# Altium PCB PCB1.PcbDoc (part 2 of 2)
Units mil, origin at the board's own origin, x right, y up, seen from the top; angles counter-clockwise.
Board outline 4250 x 4000 mil, 2 copper layers (Top Layer, Bottom Layer); 133 components, 79 nets, 459 pads, 109 vias.
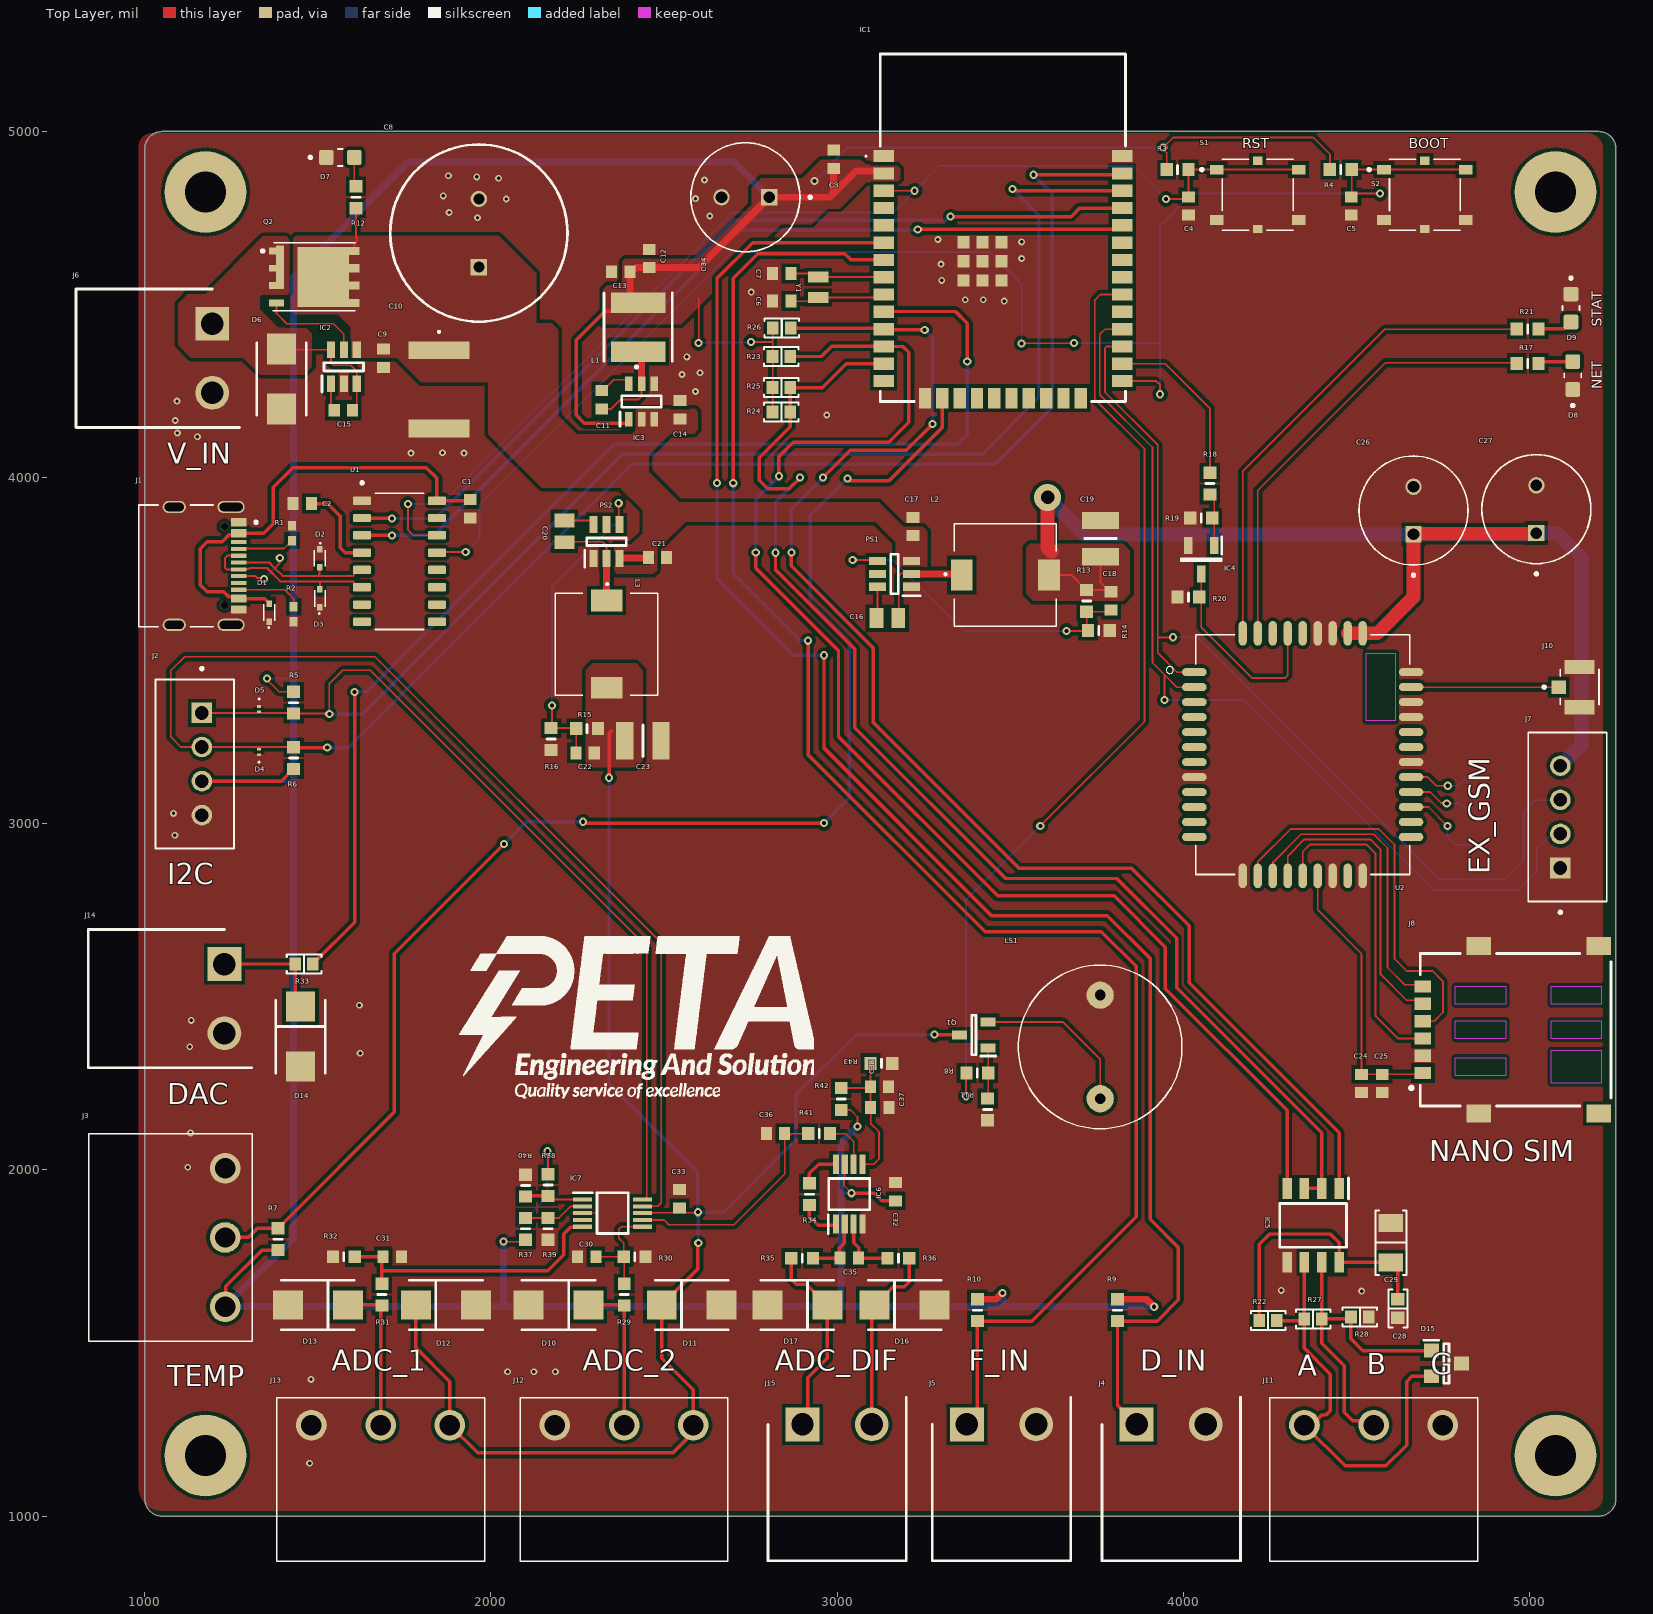
[diagram p0: Top Layer view]

## Via types
v1: diameter 23.62, hole 11.81, Top Layer to Bottom Layer, 62 vias
v2: diameter 19.68, hole 9.84, Top Layer to Bottom Layer, 46 vias
v3: diameter 78.74, hole 39.37, Top Layer to Bottom Layer, 1 vias

## Nets (pads, with @x,y where several pads share a name; then routed paths per layer and width w, separated by ;. In a path a pad name is that pad's centre, name@x,y a point inside that pad or via, vN(x,y) a via of type N, cw(c..) or ccw(c..) an arc to the next point about the centre after c; other vN are vias at no path point) (continued)
GND: (continued)
  other v2: 1476,1153 1480,1395 2048,1417 2124,1417 2186,1417 4515,1650 4283,1652 1124,2008 1132,2107 1622,2337 1130,2356 1134,2432 1620,2476 1087,2967 1083,3030 1769,4071 1922,4071 1860,4072 1152,4118 1094,4129 1088,4165 2970,4181 1093,4221 2591,4249 2552,4298 2604,4303 2566,4349 3483,4510 3370,4514 3422,4514 2752,4536 3302,4570 3300,4617 3533,4633 3533,4681 3291,4688 1961,4751 2632,4756 1879,4766 2044,4805 2591,4806 1862,4814 2617,4860 2022,4865 1959,4869 1877,4872
I2C_1_CLK: D4.2 IC1.37 IC7.9 J2.2 R6.1 | length 6700.8
  Top Layer w5: R6.1@1430,3236.5 1417.28,3223.78 1412.37,3223.78 1410.44,3221.85 J2.2 1104.15,3221.85 1075,3251 1075,3443 1115,3483 1665,3483 2492,2656 2492,1905 2482,1895 IC7.9
  Top Layer w10: R6.1 1431.5,3220 v1(1527,3220) ; v1(3567,4875) 3819.49,4875 IC1.37
  Bottom Layer w10: v1(1527,3220) 1588,3220 2407,4039 3456,4039 3621,4204 3621,4821 v1(3567,4875)
I2C_1_SDA: D5.2 IC1.36 IC7.10 J2.1 R5.1 | length 5831.2
  Top Layer w5: J2.1 1428.23,3320.28 R5.1 1531.5,3318.5 v1(1533,3317) 1533,3405 1572,3444 1651,3444 2450.02,2644.98 IC7.10@2450.02,1916.3
  Top Layer w10: v1(3507,4834) 3510.69,4834 3515.75,4828.94 IC1.36
  Bottom Layer w10: v1(1533,3317) 1629,3317 2380,4068 3419,4068 3583,4232 3583,4758 v1(3507,4834)
LSE_OSC_IN: C7.2 IC1.8 Y1.1 | length 272.7
  Top Layer w5: C7.2 2934.53,4590 Y1.1 3133.86,4579.53 IC1.8
LSE_OSC_OUT: C6.2 IC1.9 Y1.2 | length 275.9
  Top Layer w5: C6.2 2934.53,4510 Y1.2 3125.98,4520.47 IC1.9
NetC2_2: C2.2 U1.4 | length 258.1
  Top Layer w10: C2.2 1528,3925 1565,3888 1565,3797 1578.57,3783.43 U1.4
NetC11_1: C11.1 IC3.6 | length 97.6
  Top Layer w5: C11.1 2322.56,4251.38 2354.18,4283 2389.27,4283 2397.6,4274.67 IC3.6
NetC11_2: C11.2 IC3.5 L1.1 | length 263.9
  Top Layer w5: C11.2 2347.62,4198.62 2375,4226 2427,4226 2435,4234 IC3.5
  Top Layer w20: L1.1 2435,4354.13 IC3.5
NetC15_1: C15.1 D6.1 IC2.3 IC2.6 J6.1 Q2.1 Q2.2 Q2.3 Q2.10 | length 383.2
  Top Layer w5: D6.1 1397.4,4369.21 IC2.6 1537.6,4332.4 1545,4325 1595,4325 1612.4,4307.6 IC2.3 1612.4,4207.4 C15.1
NetC15_2: C15.2 IC2.1 | length 79.8
  Top Layer w5: IC2.1 1537.6,4204.65 C15.2
NetC16_1: C16.1 L2.1 PS1.2 | length 339
  Top Layer w5: C16.1@3170.07,3619.17 C16.1@3195.24,3594 ; C16.1@3178.07,3619.17 3178.07,3716.07 3186,3724 PS1.2@3215.21,3724 ; L2.1@3340.02,3739 L2.1
  Top Layer w20: PS1.2@3223.58,3722.19 3356.83,3722.19 L2.1
NetC16_2: C16.2 PS1.6 | length 94.6
  Top Layer w5: PS1.6@3116.79,3686.6 3116.79,3598.72 C16.2@3121.5,3594
NetC18_1: C18.1 PS1.4 R13.1 R14.2 | length 965.2
  Top Layer w5: v1(3045,3762) 3114.19,3762 PS1.4 ; v1(3663,3557) 3722.5,3557 R14.2 3721,3562.5 R13.1 3785.88,3612.5 C18.1
  Bottom Layer w5: v1(3045,3762) 3161,3762 3366,3557 v1(3663,3557)
NetC20_1: C20.1 L3.1 PS2.2 | length 283
  Top Layer w5: C20.1@2214,3815 2322,3815 2334,3803 PS2.2
  Top Layer w20: L3.1 PS2.2
NetC20_2: C20.2 PS2.6 | length 91.4
  Top Layer w5: C20.2 2287.29,3876.5 2296.6,3867.19 PS2.6
NetC22_1: C22.1 PS2.4 R15.1 R16.2 | length 938.4
  Top Layer w5: v1(2176,3342) 2176,3278.5 R16.2 2244.51,3276.5 R15.1 2246.01,3211.61 C22.1@2252.62,3205 ; v1(2369,3926) 2369,3866.61 PS2.4
  Bottom Layer w5: v1(2176,3342) 2176,3684.84 2369,3877.84 v1(2369,3926)
NetC35_1: C35.1 IC6.2 R35.2 | length 176.3
  Top Layer w10: R35.2 3001.5,1745 3004.54,1745 C35.1@3004.73,1745.2 ; C35.1@3001.5,1750 3005.65,1754.15 3005.65,1773.65 3020.47,1788.47 3020.47,1841.65 IC6.2
NetC35_2: C35.2 IC6.3 R36.2 | length 187.1
  Top Layer w10: IC6.3 3047.8,1790.2 3062.9,1775.1 C35.2@3062.9,1750.61 ; C35.2@3057.49,1745.2 3057.69,1745 R36.2
NetC37_1: C37.1 C38.1 IC6.5 R42.1 R43.2 | length 425.9
  Top Layer w5: R42.1 3092.06,2236.5 C38.1 ; IC6.5 3105.61,2016.61 3121,2032 3121,2110 3097.06,2133.94 C37.1 3096.5,2181.06 R43.2
NetD7_A: D7.A R12.2 | length 85.4
  Top Layer w5: D7.A 1605.35,4846.14 R12.2
NetD8_A: D8.A R17.2 | length 100.7
  Top Layer w10: R17.2 5031.85,4335.35 D8.A
NetD9_A: D9.A R21.2 | length 101.6
  Top Layer w10: R21.2 5100.01,4430 5119.66,4449.65 D9.A
NetD10_1: D10.1 J12.2 R29.1 | length 449.6
  Top Layer w10: D10.1 2383.5,1610 R29.1 2384.7,1608.2 J12.2
NetD13_1: D13.1 J13.2 R31.1 | length 446
  Top Layer w10: D13.1 1683.5,1610 R31.1 1681.36,1604.87 J13.2
NetD14_1: D14.1 J14.1 R33.2 | length 334.3
  Top Layer w10: J14.1 R33.2 1434.41,2487.2 D14.1
NetD15_1: D15.1 IC5.7 J11.2 R27.2 R28.2 | length 955.5
  Top Layer w10: IC5.7 4400,1570.59 R27.2 ; J11.2 4538.03,1275 4490,1275 4465,1300 4465,1435 4400.59,1499.41 R27.2 ; D15.1 4716.29,1478 4519,1478 4484.41,1512.59 R28.2 4479.41,1570 R27.2
NetD15_2: D15.2 IC5.6 J11.1 R22.1 R27.1 | length 1263
  Top Layer w10: R22.1 4344.41,1565 R27.1 ; IC5.6 4350,1570.59 R27.1 ; D15.2 4660.6,1403.6 4645,1388 4645,1205 4585,1145 4468.03,1145 J11.1 4371.26,1263.03 4400.44,1292.21 4412.21,1292.21 4425,1305 4425,1410 4349.41,1485.59 R27.1
NetD16_1: D16.1 J15.2 R36.1 | length 540
  Top Layer w10: J15.2 3100,1601.61 D16.1 3109.37,1610 3162.37,1663 3194,1663 3208.5,1677.5 R36.1@3208.5,1741
NetD17_1: D17.1 J15.1 R35.1 | length 570.1
  Top Layer w10: R35.1 2867.5,1684.5 2882,1670 2910.63,1670 2970.63,1610 D17.1 2971.61,1456.61 2915,1400 2915,1280 J15.1
NetIC2_5: IC2.5 Q2.4 | length 295.3
  Top Layer w5: Q2.4 1380.75,4474.25 1410,4445 1545,4445 1575,4415 IC2.5
NetIC4_1: IC4.1 R18.1 R19.2 | length 152.4
  Top Layer w5: R18.1 4089.6,3938.91 IC4.1
NetIC4_3: IC4.3 R20.1 U2.39 | length 593.1
  Top Layer w5: IC4.3 4052,3660.5 R20.1 4052,3649.5 4052,3568 4199,3421 4293,3421 4301.69,3429.69 U2.39
NetIC6_1: IC6.1 R34.1 | length 121.9
  Top Layer w10: R34.1 2920,1865 2945,1840 2993.23,1840 IC6.1
NetIC6_6: IC6.6 R41.1 | length 143.3
  Top Layer w5: R41.1 3025,2105 3047.8,2082.2 IC6.6
NetIC6_8: IC6.8 R34.2 | length 116.1
  Top Layer w10: R34.2 2920,1990 2946.61,2016.61 IC6.8
NetIC7_1: IC7.1 R38.2 R40.1 | length 169.9
  Top Layer w5: R38.2 2175.31,1914.69 IC7.1
  Top Layer w10: R40.1 2101.5,1925 R38.2
NetIC7_2: IC7.2 R37.2 R39.1 | length 183.9
  Top Layer w5: R37.2@2095,1861.5 R37.2 R39.1 2196.5,1861.5 2215,1880 2230,1895 IC7.2
NetJ1_A5: J1.A5 R1.1 | length 164.3
  Top Layer w5: J1.A5 1273.23,3795.43 1402.24,3795.43 1413.88,3807.07 1415.85,3807.07 1425.16,3816.38 R1.1
NetJ1_B5: J1.B5 R2.2 | length 192.2
  Top Layer w5: J1.B5 1403.9,3676.1 1430,3650 R2.2
NetJ9_2: J9.2 U2.26 | length 208.4
  Top Layer w5: U2.26 4705.96,3135.04 4731,3110 v1(4764,3110)
  Bottom Layer w5: v1(4764,3110) 4794,3110 4810.74,3126.74 4835.17,3126.74 J9.2
NetJ9_3: J9.3 U2.25 | length 209.2
  Top Layer w5: U2.25 4713.27,3091.73 4744.85,3060.15 4759.85,3060.15 v1(4761,3059)
  Bottom Layer w5: v1(4761,3059) 4801,3059 4810.74,3049.26 4833.89,3049.26 J9.3
NetJ9_4: J9.4 U2.24 | length 250.1
  Top Layer w5: U2.24 4708.42,3048.43 v1(4763.35,2993.49)
  Bottom Layer w5: v1(4763.35,2993.49) 4763.35,2962.65 4786.28,2939.72 J9.4
NetJ10_1: J10.1 U2.32 | length 429
  Top Layer w5: U2.32 5080.08,3394.88 J10.1@5084.96,3390
NetLS1_1: LS1.1 Q1.2 | length 482.5
  Top Layer w5: Q1.2 3652.2,2427.8 3760,2320 LS1.1
NetQ1_1: Q1.1 R8.1 R11.1 | length 146.3
  Top Layer w5: R11.1 3436.34,2207.83 Q1.1
NetR17_1: R17.1 U2.41 | length 1314.8
  Top Layer w5: U2.41 4215.08,3963.08 4584,4332 4961.5,4332 R17.1
NetR21_1: R21.1 U2.42 | length 1430.4
  Top Layer w5: U2.42 4171.77,4018.77 4582,4429 4962.5,4429 R21.1
NRST: C4.1 IC1.3 R3.1 S1.1 S1.2 U1.14 | length 3382.8
  Top Layer w5: v1(1760,3924) 1760,3849 1775.57,3833.43 U1.14 ; IC1.3 v1(3224,4828.94) ; v1(3950,4805) 4008.62,4805 C4.1 R3.1@4015,4873.8 ; S1.2 4035,4890 ; R3.1@4015,4873.8 R3.1 4035,4890 ; R3.1@4015,4873.8 4020.71,4879.51 4024.51,4879.51 4024.51,4884.29 4030.22,4890 4035,4890
  Bottom Layer w5: v1(1760,3924) 1856.25,3924 2698.25,4766 3161.06,4766 v1(3224,4828.94) 3295.37,4900.31 3854.69,4900.31 v1(3950,4805)
RO: IC1.11 IC5.1 R26.1 | length 3989.6
  Top Layer w10: R26.1 3131.39,4432 IC1.11 3136.39,4427 v1(3253,4427) ; v1(2868,3784) 2867,3783 2867,3745 3105,3507 3105,3292 3526,2871 3851,2871 4017,2705 4017,2541 4450,2108 IC5.1 ; v1(2959,4000) 3037.8,4078.8 3199.8,4078.8 v1(3276,4155)
  Bottom Layer w10: v1(2868,3784) 2868,3909 v1(2959,4000) ; v1(3253,4427) 3276,4404 v1(3276,4155)
SIM_CLK: J8.C3 U2.16 | length 875.3
  Top Layer w5: U2.16 4301.69,2906.69 4350,2955 4540,2955 4570,2925 4570,2565 4645,2490 4682.28,2490 J8.C3
SIM_DATA: J8.C7 U2.15 | length 890.8
  Top Layer w5: U2.15 4259.46,2850.68 4259.46,2889.46 4340,2970 4550,2970 4590,2930 4590,2585 4640,2535 4687.28,2535 J8.C7
SIM_DET: J8.C6 U2.14 | length 1148.3
  Top Layer w5: U2.14 4215.08,2890.08 4310,2985 4565,2985 4610,2940 4610,2610 4645,2575 4720,2575 4750,2545 4750,2455 4725,2430 J8.C6
SIM_EN: IC1.26 R18.2 | length 492.5
  Top Layer w5: IC1.26 3948.06,4328.94 4077,4200 R18.2
SIM_RST: J8.C2 U2.17 | length 933.2
  Top Layer w5: U2.17 4345,2920 4365,2940 4530,2940 4555,2915 4555,2445 4620,2380 J8.C2
SIM_RX: IC1.27 J7.3 U2.1 | length 2754.3
  Top Layer w5: IC1.27 3778.06,4378.94 3774,4374.87 3774,4247 3926,4095 3926,3538 ; v1(3970,3539) 3969,3538 3926,3538 ; U2.1 3981.81,3438.19 3926,3494 3926,3538
  Bottom Layer w5: v1(3970,3539) 4042,3539 4741,2840 4928,2840 4983,2895 4983,3035 5016,3068 5088.12,3068 J7.3
SIM_TX: IC1.28 J7.2 U2.2 | length 2781
  Top Layer w5: IC1.28 3773.94,4428.94 3759,4414 3759,4239 3911,4087 3911,3465 3946.06,3429.94 ; v1(3946,3358) 3946.06,3358.06 3946.06,3429.94 ; U2.2 3981.12,3394.88 3946.06,3429.94
  Bottom Layer w5: v1(3946,3358) 4174,3358 4723,2809 4968,2809 5022,2863 5022,2929 5053.38,2960.38 5078.93,2960.38 J7.2
SIM_VDD: C24.2 C25.2 J8.C1 U2.18 | length 804.5
  Top Layer w5: U2.18 4388.31,2751.69 4515,2625 C24.2 C25.2 4688.66,2276.38 J8.C1
TMP: IC1.16 J3.2 R7.1 | length 4040.7
  Top Layer w10: J3.2 1299.02,1805 1325.51,1831.5 R7.1 1385.98,1831.5 1398.7,1844.21 1398.7,1845.2 1721,2167.5 1721,2625 v1(2038,2942) ; v1(2266,3006) 2270,3002 v1(2962,3002) ; v1(3030,3998) 3030,3996.86 3035.86,3991 3149.92,3991 3303.94,4145.02 IC1.16
  Bottom Layer w10: v1(2038,2942) 2102,3006 v1(2266,3006) ; v1(2962,3002) 3035,3075 3035,3527 2923,3639 2923,3891 v1(3030,3998)
U0TXD_MTDO_P_CTL: IC1.23
USB_N: D3.2 J1.A7 J1.B7 U1.6 | length 514.7
  Top Layer w5.91: J1.B7 1238.32,3774.53 1231.84,3768.05 1231.84,3763.16 1232,3763 1232,3738.62 1235.46,3735.16 J1.A7 1272.83,3735.98 1299.81,3735.98 1302.77,3738.94 1352.9,3738.94 1391.36,3700.47 1508,3700.47 ; D3.2@1506,3683 1506,3698.47 1508,3700.47 ; U1.6 1613.99,3683.43 1604.74,3692.67 1604.74,3696.95 1601.22,3700.47 1508,3700.47
USB_P: D2.2 J1.A6 J1.B6 U1.5 | length 594.7
  Top Layer w5.91: J1.B6 1319.73,3715.47 1324.82,3710.39 1340.61,3710.39 v1(1344,3707) ; J1.A6 1359.48,3754.84 1375.66,3738.66 ; v1(1390,3768) 1388.79,3766.79 1388.79,3751.79 1375.66,3738.66 ; D2.2@1505,3737.02 1505,3721.8 1499.58,3716.38 ; U1.5 1613.99,3733.43 1604.74,3724.18 1604.74,3719.9 1601.22,3716.38 1499.58,3716.38 ; 1375.66,3738.66 1397.94,3716.38 1499.58,3716.38
  Bottom Layer w5.91: v1(1344,3707) 1386.61,3749.61 1386.61,3764.61 v1(1390,3768)
USB_VBUS: C1.2 D1.2 J1.A4_B9 J1.B4_A9 U1.16 | length 1348.7
  Top Layer w10: D1.2 1360,3637.56 1347.05,3650.51 J1.B4_A9 1267.32,3655.2 1243.35,3655.2 1228.55,3670 1180,3670 1160,3690 1160,3742.5 1160,3795 1180,3815 1223.55,3815 1243.35,3834.8 1267.32,3834.8 J1.A4_B9 1343.49,3839.49 1371,3867 1371,3972 1428,4029 1813,4029 1844.05,3997.95 U1.16 1937.05,3933.43 C1.2 C1.2@1942.38,3934
pads on no net: IC1.4 IC1.5 IC1.14 IC1.17 IC1.18 IC1.19 IC1.20 IC1.21 IC1.22 IC1.24 IC1.29 IC1.31 IC1.32 IC1.33 IC7.4 J1. J1.A8 J1.B8 J8.SW PS1.5 PS2.5 S1.G1 S2.G1 U1.7 U1.8 U1.9 U1.10 U1.11 U1.12 U1.15 U2.3 U2.4 U2.5 U2.6 U2.7 U2.9 U2.10 U2.11 U2.12 U2.20 U2.22 U2.23 U2.28 U2.29 U2.38 U2.40

## Polygon pours and split planes (outlines as drawn)
GND on Top Layer "GND_L01_P008" (solid, pour order 8): 982.28,1085 982.28,4956 cw(c1021.28,4956) 1021.28,4995 5167.28,4995 cw(c5167.28,4950) 5212.28,4950 5212.28,1058 cw(c5169.28,1058) 5169.28,1015 1052.28,1015 cw(c1052.28,1085)
+VIN on Top Layer "+VIN_L01_P000" (solid, pour order 0): 1992,4125 2146,3971 2377,3971 2377,3967 2438,3906 2438,3840 2405,3807 2359,3807 2353,3801 2353,3733 2364,3722 2469,3722 2480,3733 2480,3807 2496,3807 2562,3873 3110,3873 3169,3814 3169,3751 3182,3738 3257,3738 3261,3742 3261,3845.07 3247.5,3858.57 3190.5,3858.57 3120.06,3929 2544,3929 2456,4017 2456,4065 2518,4127 2587,4127 2598,4138 2598,4191 2590,4199 2423,4199 2416,4192 2417,4191 2417,4135 2407,4125 2248,4125 2194,4179 2194,4428 2176,4446 2017,4446 1992,4421
+3.3 on Top Layer "+3.3_L01_P001" (solid, pour order 1): 2324,4443 2324,4544 2336,4556 2366.95,4556 2379.57,4568.61 2379.57,4623.5 2388.63,4632.57 2597.57,4632.57 2754,4789 2754,4838 2781,4865 2899,4865 2953,4919 3068,4919 3082,4905 3170,4905 3183,4892 3183,4863 3173,4853 3084,4853 3008,4777 2972,4777 2927,4732 2838,4732 2549,4443
+VIN on Top Layer "+VIN_L01_P007" (solid, pour order 7): 1422,4685 1436,4699 2022,4699 2131,4590 2131,4304 2102,4275 1799,4275 1728,4346 1598,4346 1595,4349 1595,4435 1558,4472 1435,4472 1422,4485
NetC15_1 on Top Layer "NETC15_1_L01_P005" (solid, pour order 5): 1413,4528 1418,4533 1418,4688 1409,4697 1341,4697 1174,4530 1121,4530 1121,4527 1096,4502 1096,4384 1133,4347 1284,4347 1333,4298 1461,4298 1483,4320 1483,4416 1466,4433 1385,4433 1332,4486 1332,4522 1338,4528
+4.1V on Top Layer "+4.1V_L01_P002" (solid, pour order 2): 3556,3809 3826,3809 3846,3789 3846,3664 3826,3644 3566,3644 3546,3664 3546,3799
+5 on Top Layer "+5_L01_P003" (solid, pour order 3): 2274,3174 2274,3444 2294,3464 2419,3464 2439,3444 2439,3184 2419,3164 2284,3164
GND on Bottom Layer "GND_L02_P006" (solid, pour order 6): 1010,1080 1010,4951 cw(c1049,4951) 1049,4990 5195,4990 cw(c5195,4945) 5240,4945 5240,1053 cw(c5197,1053) 5197,1010 1080,1010 cw(c1080,1080)

## Silkscreen, mask and mechanical layers (free items; w line width, h text height)
Top Overlay:
  drawing of 57 lines, arcs and shapes, not listed
  text "RST" at 4171,4951 h30
  text "BOOT" at 4651,4951 h30
  text "STAT" at 5209,4436 h30 r90
  text "NET" at 5209,4256 h30 r90
  text "V_IN" at 1065,4040 h60
  text "EX_GSM" at 4885,2855 h60 r90
  text "I2C" at 1065,2825 h60
  text "DAC" at 1065,2190 h60
  text "NANO SIM" at 4710,2025 h60
  text "ADC_1" at 1540,1420 h60
  text "ADC_2" at 2265,1420 h60
  text "ADC_DIF" at 2820,1420 h60
  text "F_IN" at 3380,1420 h60
  text "D_IN" at 3875,1420 h60
  text "B" at 4530,1410 h60
  text "G" at 4715,1410 h60
  text "A" at 4330,1405 h60
  text "TEMP" at 1065,1375 h60
Mechanical 13:
  lines w10: 1000,1050 ccw(c1050,1050) 1050,1000 5200,1000 ccw(c5200,1050) 5250,1050 5250,4950 ccw(c5200,4950) 5200,5000 4995,5000 1355,5000 1050,5000 ccw(c1050,4950) 1000,4950 1000,1050